# Altium PCB DAC-AK4493-DUAL.PcbDoc
Units mm, origin at the board's own origin, x right, y up, seen from the top; angles counter-clockwise.
Board outline 91 x 50 mm, 4 copper layers (Top Layer, VCC, GND, Bottom Layer), stack 1.62 mm thick; 94 components, 53 nets, 302 pads, 204 vias.
Unrouted connection lines stored in the file: 3.
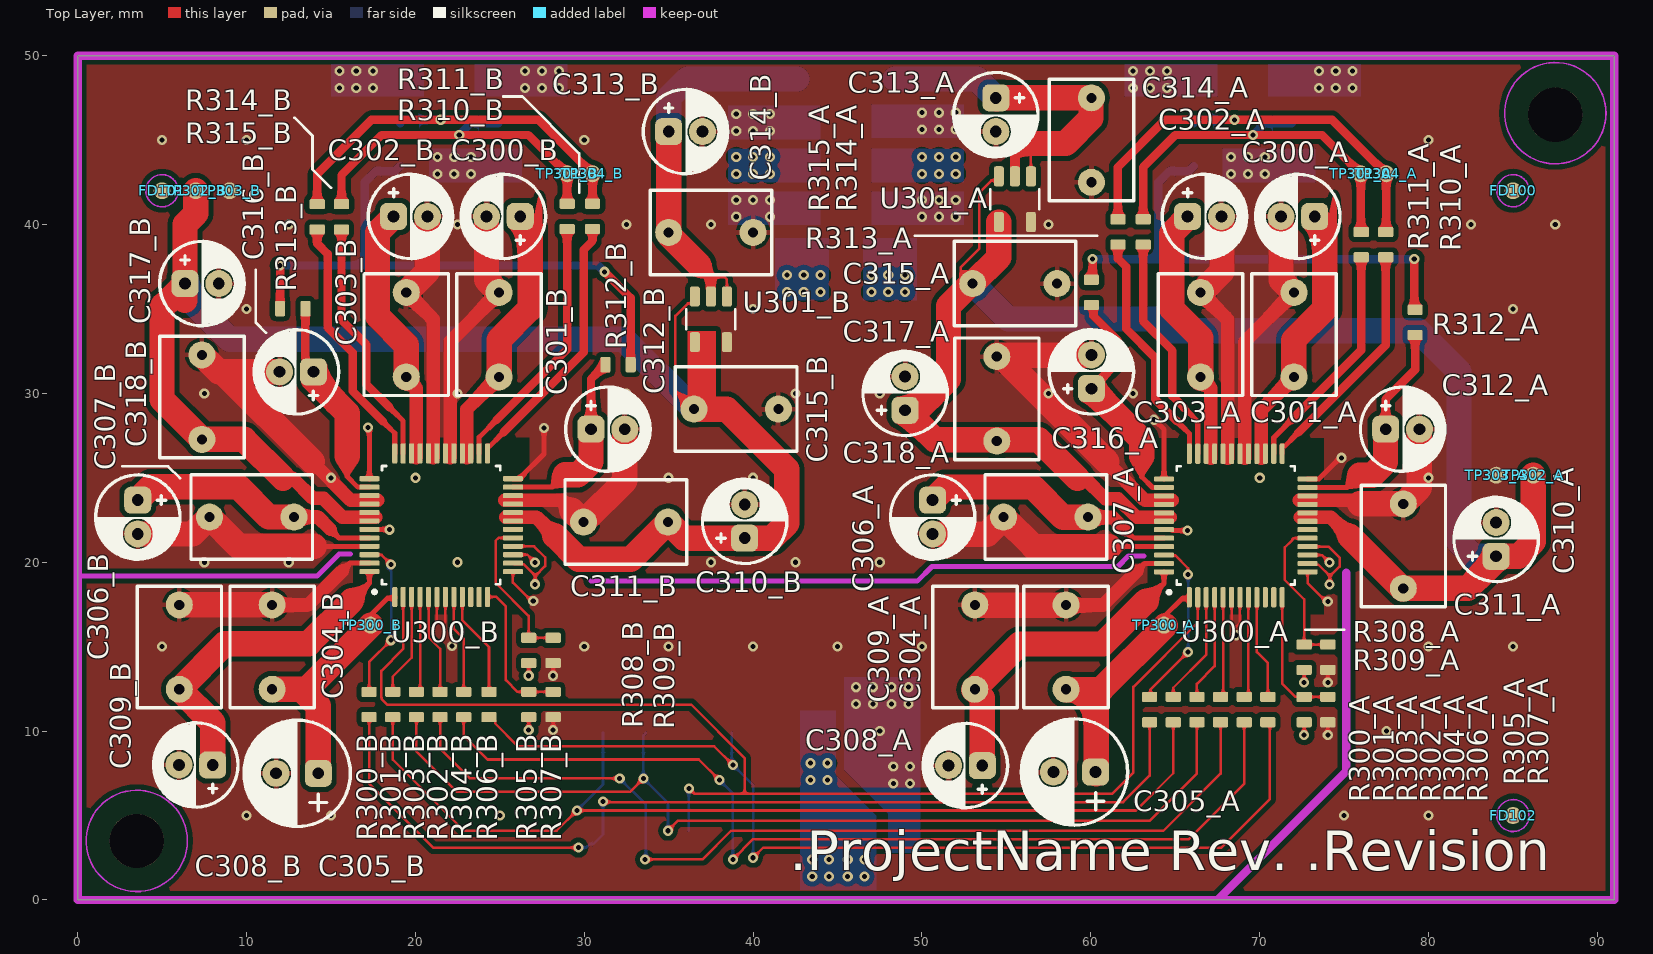
[diagram p0: Top Layer view]
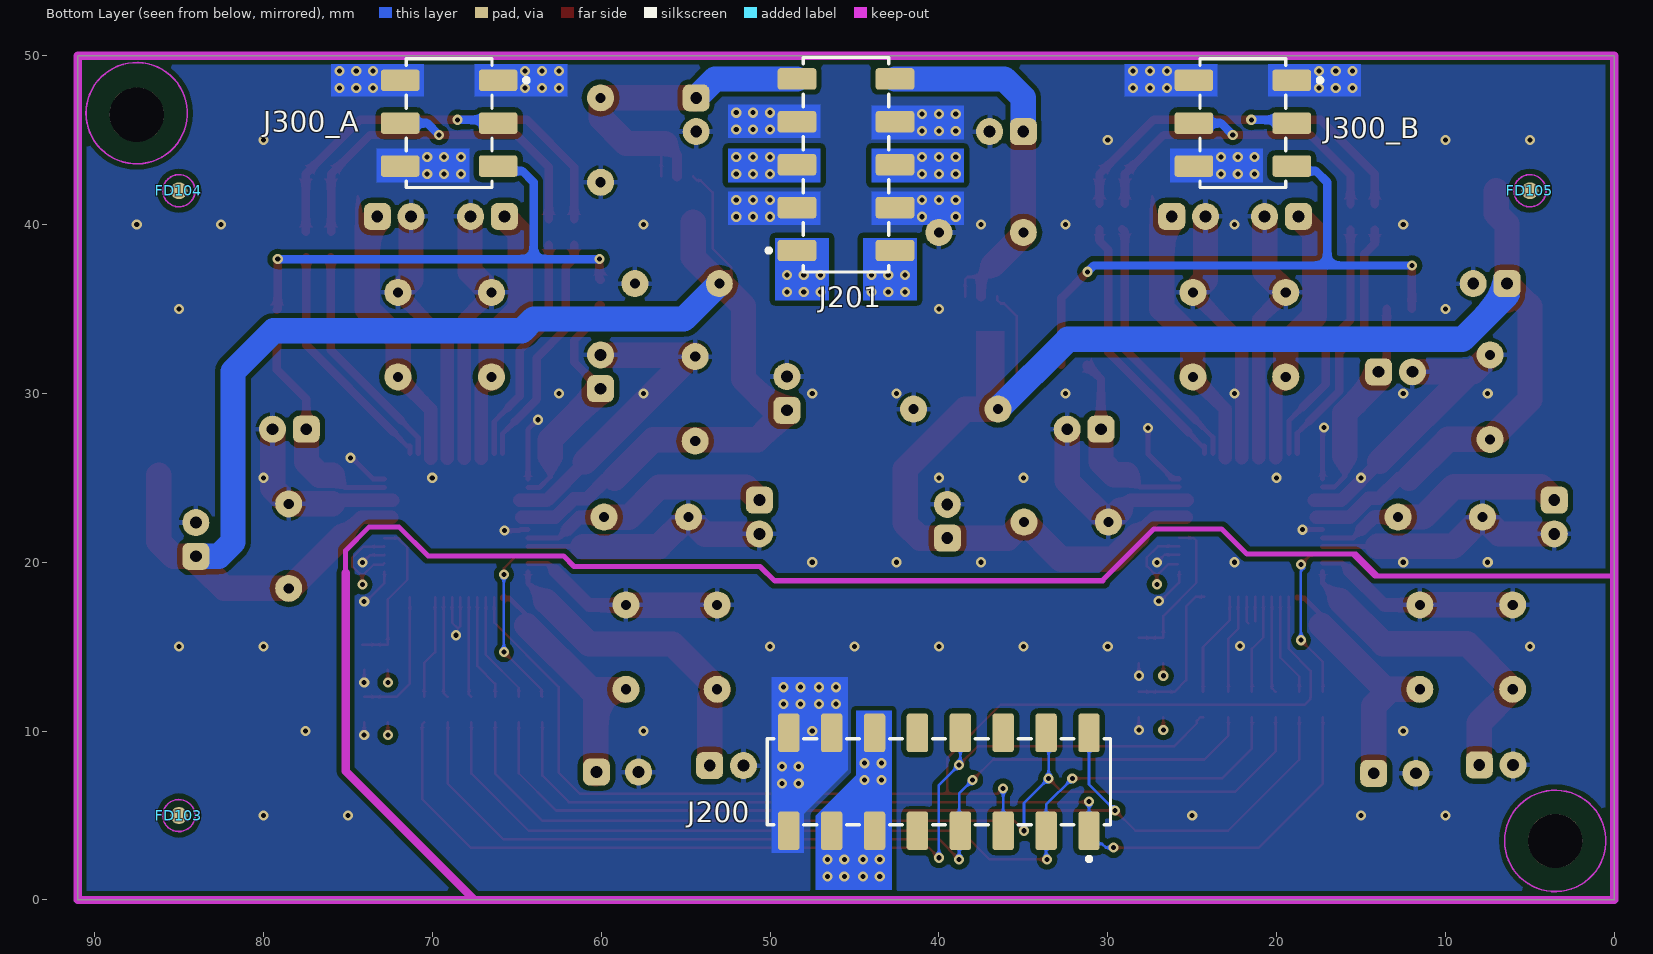
[diagram p1: Bottom Layer view, seen from below]
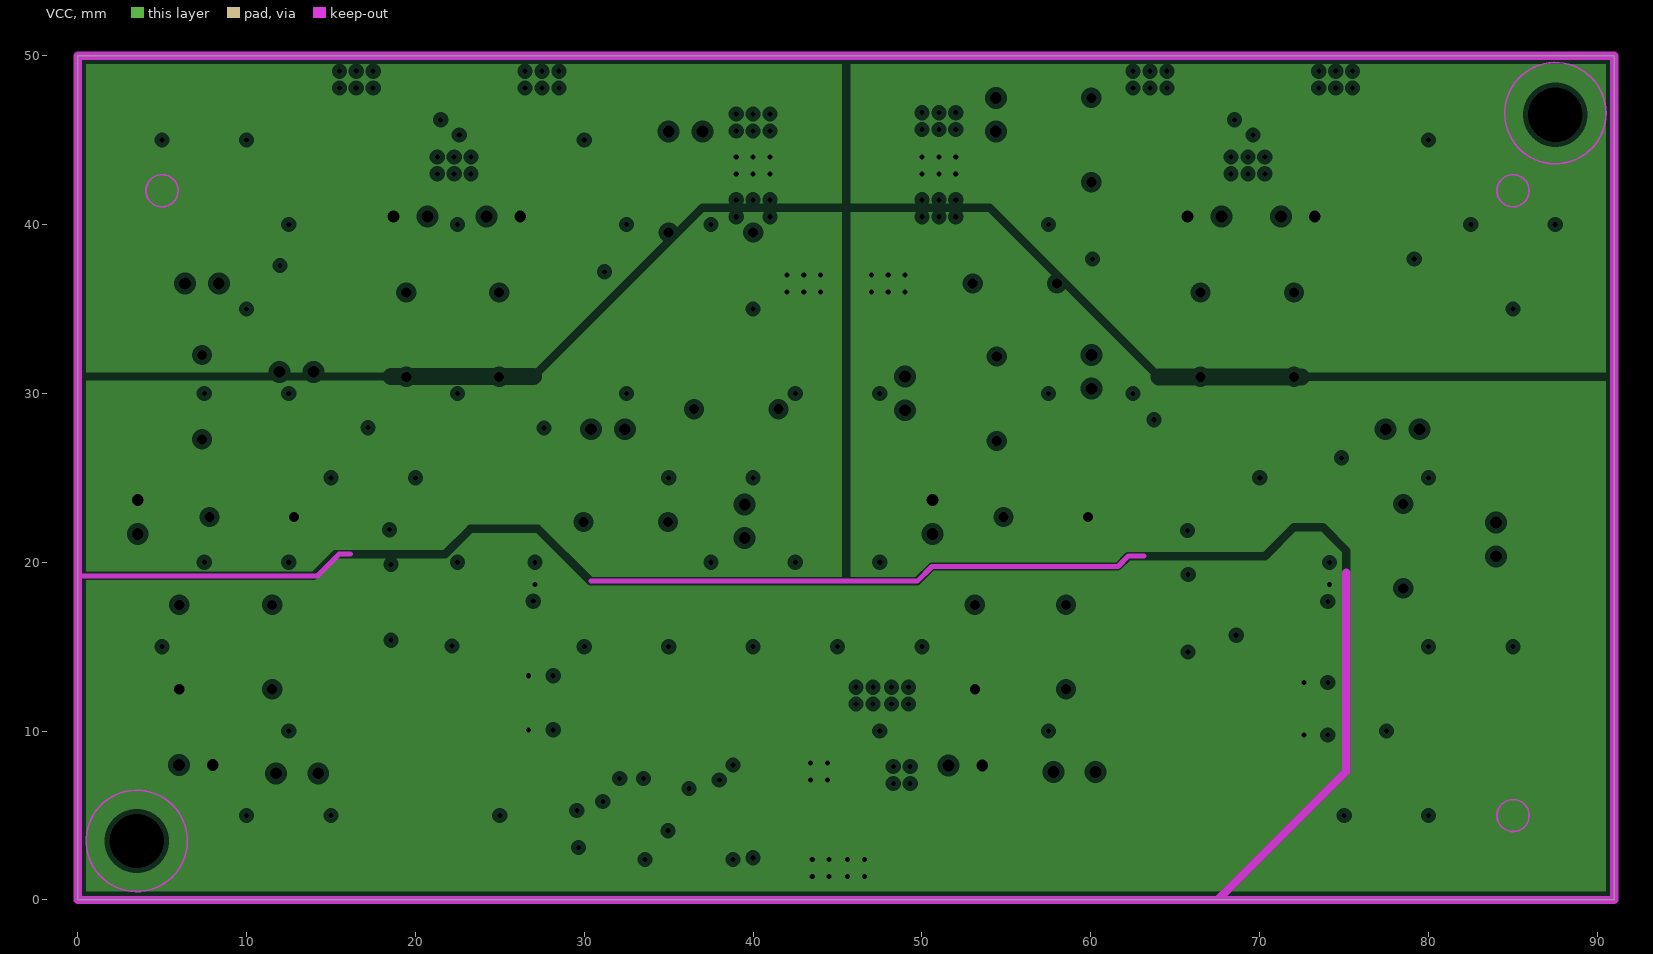
[diagram p2: VCC, clearances drawn from the general rule]
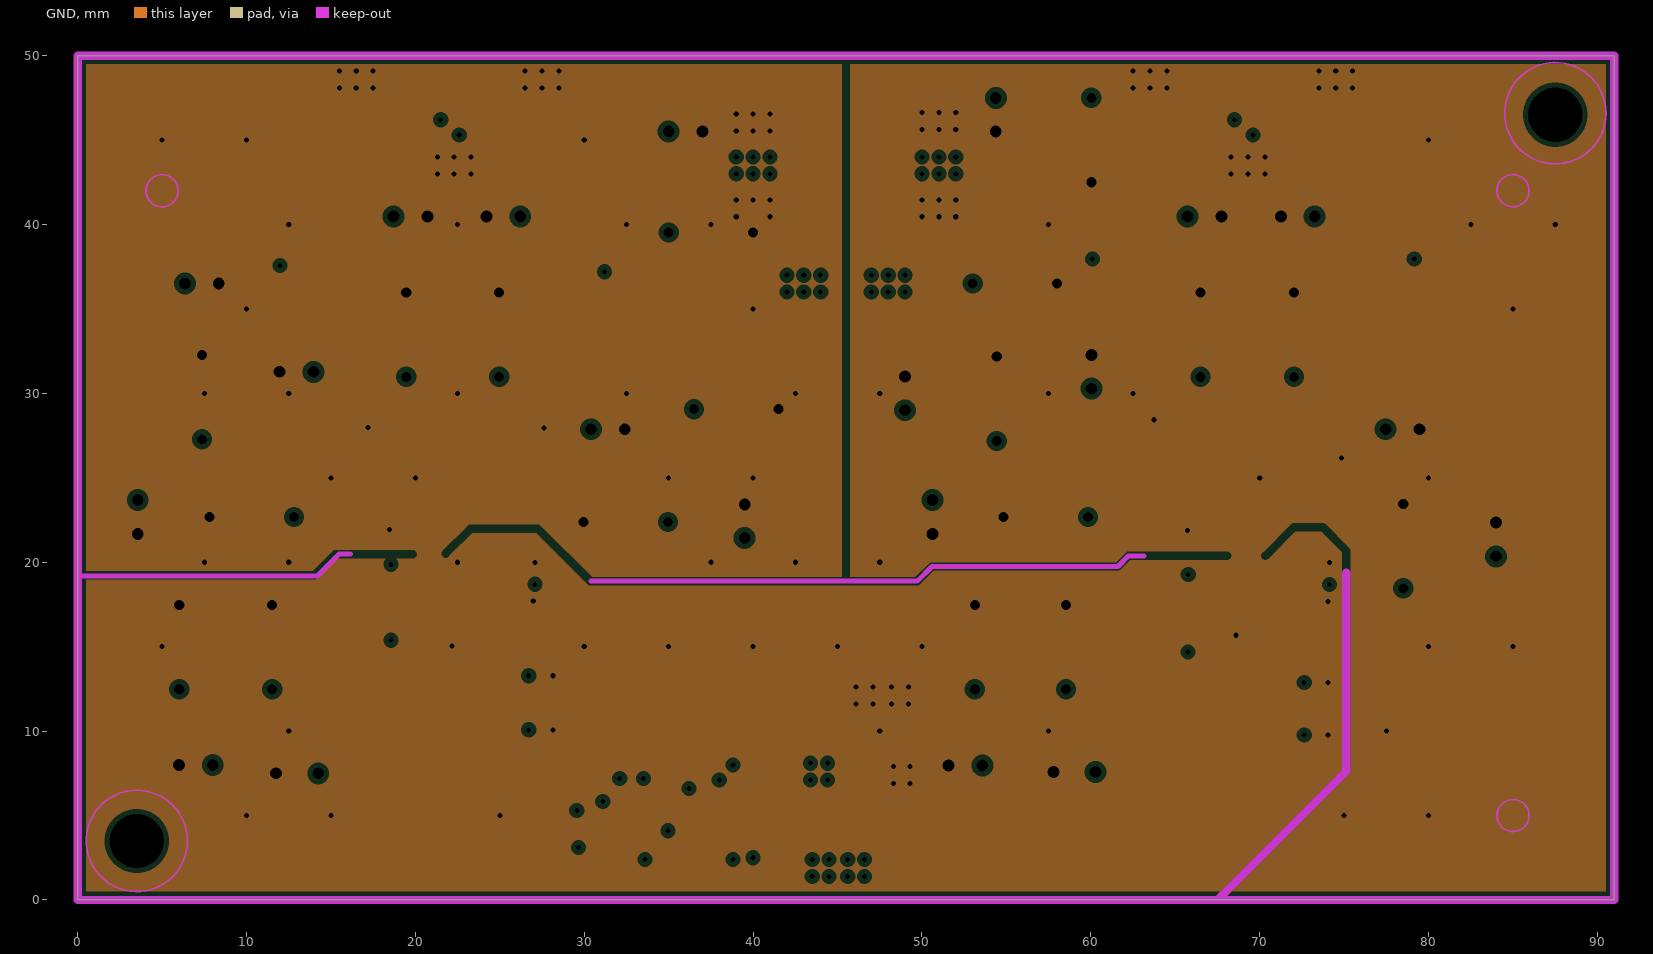
[diagram p3: GND, clearances drawn from the general rule]

## Layer stack, top to bottom
Top Solder: solder mask 0.0102, Solder Resist, Dk 3.5
Top Layer: signal copper 0.035
Dielectric 2: prepreg 0.14, PP-010, Dk 4.3
VCC: plane copper 0.035
Dielectric 1: core 1.2, Core-042, Dk 4.6
GND: plane copper 0.035, net AGND
Dielectric 3: prepreg 0.14, PP-010, Dk 4.3
Bottom Layer: signal copper 0.035
Bottom Solder: solder mask 0.0102, Solder Resist, Dk 3.5

## Board outline
0,0 91,0 91,50 0,50

## Design rules (kind name [scope] priority, off if disabled: settings)
Clearance "Clearance Polygon Highspeed" [InPolygon and InNet('GND') vs InNetClass('Ethernet') or InNetClass('HDMI') or InNetClass('LVDS') or InNetClass('PCIe') or InNetClass('SATA') or InNetClass('USBO1_HS') or InNetClass('USBO1_SS') or InNetClass('USBH2_HS') or InNetClass('USBH3_HS') or InNetClass('USBH4_HS') or InNetClass('USBH4_SS')] p1: gap=0.15 ignorepadtopadclearanceinfootprint=FALSE except(0: Arc-Hole Track-Hole SMDPad-Hole THPad-Hole Via-Hole Fill-Hole Poly-Hole Region-Hole Text-Hole; 1.5: Arc-Fill Arc-Poly Arc-Region Track-Fill Track-Poly Track-Region SMDPad-Fill SMDPad-Poly SMDPad-Region THPad-Fill THPad-Poly THPad-Region Via-Fill Via-Poly Via-Region Fill-Fill Fill-Poly Fill-Region Poly-Poly Poly-Region Region-Region)
Clearance "Analog Polygon" [InNet('AGND') and InPolygon] p2: gap=0.15 ignorepadtopadclearanceinfootprint=FALSE except(0: Arc-Hole Track-Hole SMDPad-Hole THPad-Hole Via-Hole Fill-Hole Poly-Hole Region-Hole Text-Hole; 0.3: Arc-Fill Arc-Poly Arc-Region Track-Fill Track-Poly Track-Region SMDPad-Fill SMDPad-Poly SMDPad-Region THPad-Fill THPad-Poly THPad-Region Via-Fill Via-Poly Via-Region Fill-Fill Fill-Poly Fill-Region Poly-Poly Poly-Region Region-Region)
Clearance "Digital Polygon" [InNet('GND') and InPolygon] p3: gap=0.15 ignorepadtopadclearanceinfootprint=FALSE except(0: Arc-Hole Track-Hole SMDPad-Hole THPad-Hole Via-Hole Fill-Hole Poly-Hole Region-Hole Text-Hole; 0.3: Arc-Fill Arc-Poly Arc-Region Track-Fill Track-Poly Track-Region SMDPad-Fill SMDPad-Poly SMDPad-Region THPad-Fill THPad-Poly THPad-Region Via-Fill Via-Poly Via-Region Fill-Fill Fill-Poly Fill-Region Poly-Poly Poly-Region Region-Region)
Clearance "Diff Pairs" [InNetClass('Ethernet') or InNetClass('SATA') or InNetClass('HDMI') or InNetClass('PCIe') or InNetClass('LVDS')] p4: gap=0.1 ignorepadtopadclearanceinfootprint=FALSE except(1: Arc-Fill Arc-Poly Arc-Region Track-Fill Track-Poly Track-Region SMDPad-Fill SMDPad-Poly SMDPad-Region THPad-Fill THPad-Poly THPad-Region Via-Fill Via-Poly Via-Region Fill-Fill Fill-Poly Fill-Region Poly-Poly Poly-Region Region-Region)
Clearance [All] p5: gap=0.15 ignorepadtopadclearanceinfootprint=FALSE except(0: Arc-Hole Track-Hole SMDPad-Hole THPad-Hole Via-Hole Fill-Hole Poly-Hole Region-Hole Text-Hole)
ComponentClearance [All] p1: gap=0.2 collisioncheckmode=3 verticalgap=0.2 showdistances=FALSE
DiffPairsRouting Diff_Ethernet [InNetClass('Ethernet')] p1: maxlimit=2 minlimit=0.135 mostfreqgap=0.135 toplayer_minwidth=0.165 toplayer_maxwidth=0.165 toplayer_prefwidth=0.165 bottomlayer_minwidth=0.165 bottomlayer_maxwidth=0.165 bottomlayer_prefwidth=0.165 impedanceprofiledriven=TRUE impedanceprofileid={0758E92C-ECA7-4BD1-944C-2B5039B24D7F} impedanceprofilevalue=95.000000 maxuncoupledlength=12.7
DiffPairsRouting Diff_PCIe [InNetClass('PCIe')] p2: maxlimit=2 minlimit=0.16 mostfreqgap=0.16 toplayer_minwidth=0.198 toplayer_maxwidth=0.198 toplayer_prefwidth=0.198 bottomlayer_minwidth=0.198 bottomlayer_maxwidth=0.198 bottomlayer_prefwidth=0.198 impedanceprofiledriven=TRUE impedanceprofileid={872D3C10-AE81-4B26-BAE9-CD09B3029D58} impedanceprofilevalue=90.000000 maxuncoupledlength=12.7
DiffPairsRouting Diff_HDMI [InNetClass('HDMI')] p3: maxlimit=2 minlimit=0.16 mostfreqgap=0.16 toplayer_minwidth=0.198 toplayer_maxwidth=0.198 toplayer_prefwidth=0.198 bottomlayer_minwidth=0.198 bottomlayer_maxwidth=0.198 bottomlayer_prefwidth=0.198 impedanceprofiledriven=TRUE impedanceprofileid={872D3C10-AE81-4B26-BAE9-CD09B3029D58} impedanceprofilevalue=90.000000 maxuncoupledlength=12.7
DiffPairsRouting Diff_SATA [InNetClass('SATA')] p4: maxlimit=2 minlimit=0.105 mostfreqgap=0.105 toplayer_minwidth=0.165 toplayer_maxwidth=0.165 toplayer_prefwidth=0.165 bottomlayer_minwidth=0.165 bottomlayer_maxwidth=0.165 bottomlayer_prefwidth=0.165 impedanceprofiledriven=TRUE impedanceprofileid={3923B0F9-8FB3-4A4E-B013-C19AAABC556E} impedanceprofilevalue=90.000000 maxuncoupledlength=12.7
DiffPairsRouting Diff_LVDS [InNetClass('LVDS')] p5: maxlimit=2 minlimit=0.17 mostfreqgap=0.17 toplayer_minwidth=0.165 toplayer_maxwidth=0.165 toplayer_prefwidth=0.165 bottomlayer_minwidth=0.165 bottomlayer_maxwidth=0.165 bottomlayer_prefwidth=0.165 impedanceprofiledriven=TRUE impedanceprofileid={7474D7DC-58A7-4FA6-A522-E63227D1F5B1} impedanceprofilevalue=100.000000 maxuncoupledlength=12.7
DiffPairsRouting DiffPairsRouting_USB [All] p6: maxlimit=2 minlimit=0.16 mostfreqgap=0.16 toplayer_minwidth=0.1 toplayer_maxwidth=0.198 toplayer_prefwidth=0.198 bottomlayer_minwidth=0.1 bottomlayer_maxwidth=0.198 bottomlayer_prefwidth=0.198 impedanceprofiledriven=TRUE impedanceprofileid={872D3C10-AE81-4B26-BAE9-CD09B3029D58} impedanceprofilevalue=90.000000 maxuncoupledlength=12.7
FabricationTestPointUsage FabricationTestPointUsage_1 [All] p1: valid=0 allowmultiple=FALSE
FabricationTestpoint FabricationTestpoint_1 [All] p1: side=3 testpointundercomponent=TRUE minsize=1.016 maxsize=2.54 preferedsize=1.524 minholesize=0 maxholesize=1.016 preferedholesize=0.813 testpointgrid=0.025 allowsidetop=TRUE allowsidebottom=TRUE usegrid=TRUE gridtolerance=0
Height [All] p1: minheight=0 maxheight=100 prefheight=0.254
HoleSize [All] p1: absolutevalues=TRUE maxlimit=6 minlimit=0.2 maxpercent=80.000 minpercent=20.000
HoleSize FabricationTestpoint [All] p2 off: absolutevalues=TRUE maxlimit=2.54 minlimit=0.025 maxpercent=80.000 minpercent=20.000
HoleSize FabricationTestPointUsage [All] p3 off: absolutevalues=TRUE maxlimit=2.54 minlimit=0.025 maxpercent=80.000 minpercent=20.000
MatchedLengths Match_PCIe [InNetClass('PCIe')] p1: tolerance=2 checknetsindiffpair=FALSE checkdiffpairvsdiffpair=TRUE checkxsignals=TRUE checkothers=TRUE
MatchedLengths Match_PCIe_Intra [InNetClass('PCIe')] p2: tolerance=0.15 checknetsindiffpair=TRUE checkdiffpairvsdiffpair=FALSE checkxsignals=FALSE checkothers=FALSE
MatchedLengths Match_SATA [InNetClass('SATA')] p3: tolerance=2 checknetsindiffpair=FALSE checkdiffpairvsdiffpair=TRUE checkxsignals=TRUE checkothers=TRUE
MatchedLengths Match_SATA_Intra [InNetClass('SATA')] p4: tolerance=0.15 checknetsindiffpair=TRUE checkdiffpairvsdiffpair=FALSE checkxsignals=FALSE checkothers=FALSE
MatchedLengths Match_Ethernet [InNetClass('Ethernet')] p5: tolerance=2 checknetsindiffpair=FALSE checkdiffpairvsdiffpair=TRUE checkxsignals=TRUE checkothers=TRUE
MatchedLengths Match_Ethernet_Intra [InNetClass('SATA')] p6: tolerance=0.25 checknetsindiffpair=TRUE checkdiffpairvsdiffpair=FALSE checkxsignals=FALSE checkothers=FALSE
MatchedLengths Match_HDMI [InNetClass('HDMI')] p7: tolerance=2 checknetsindiffpair=FALSE checkdiffpairvsdiffpair=TRUE checkxsignals=TRUE checkothers=TRUE
MatchedLengths Match_HDMI_Intra [InNetClass('HDMI')] p8: tolerance=0.75 checknetsindiffpair=TRUE checkdiffpairvsdiffpair=FALSE checkxsignals=FALSE checkothers=FALSE
MatchedLengths Match_LVDS_Intra [InNetClass('LVDS')] p9: tolerance=0.15 checknetsindiffpair=FALSE checkdiffpairvsdiffpair=TRUE checkxsignals=TRUE checkothers=TRUE
MatchedLengths Match_USBO1_SS [InNetClass('USBO1_SS')] p10: tolerance=2 checknetsindiffpair=FALSE checkdiffpairvsdiffpair=TRUE checkxsignals=TRUE checkothers=TRUE
MatchedLengths Match_USBH4_SS [InNetClass('USBH4_SS')] p11: tolerance=2 checknetsindiffpair=FALSE checkdiffpairvsdiffpair=TRUE checkxsignals=TRUE checkothers=TRUE
MatchedLengths Match_USB_SS_Intra [InNetClass('USBO1_SS') or InNetClass('USBH4_SS')] p12: tolerance=0.15 checknetsindiffpair=TRUE checkdiffpairvsdiffpair=FALSE checkxsignals=FALSE checkothers=FALSE
MatchedLengths Match_USB_HS_Intra [InNetClass('USBO1_HS') or InNetClass('USBH2_HS') or InNetClass('USBH3_HS') or InNetClass('USBH4_HS')] p13: tolerance=1.1 checknetsindiffpair=TRUE checkdiffpairvsdiffpair=FALSE checkxsignals=FALSE checkothers=FALSE
MinimumAnnularRing [All] p1: minimumring=0.15
MinimumSolderMaskSliver [All] p1: minsoldermaskwidth=0.1
PlaneClearance [All] p1: clearance=0.3
PlaneConnect [All] p1: planeconnectstyle=Direct reliefexpansion=0.4 reliefentries=4 reliefconductorwidth=0.15 reliefairgap=0.15
PolygonConnect [All] p1: thpad.connectstyle=Relief thpad.reliefconductorwidth=0.3 thpad.reliefentries=4 thpad.polygonreliefangle="90 Angle" thpad.airgapwidth=0.2 smdpad.connectstyle=Direct smdpad.reliefconductorwidth=0.15 smdpad.reliefentries=4 smdpad.polygonreliefangle="90 Angle" smdpad.airgapwidth=0.254 via.connectstyle=Direct via.reliefconductorwidth=0.15 via.reliefentries=4 via.polygonreliefangle="90 Angle" via.airgapwidth=0.254
RoutingCorners [All] p1: cornerstyle=45-Degree minsetback=1.25 maxsetback=1.25
RoutingVias [All] p1: holewidth=0.3 width=0.6 viastyle="Through Hole" minholewidth=0.2 minwidth=0.45 maxholewidth=0.45 maxwidth=0.75
SilkToSilkClearance [All] p1: silktosilkclearance=0.1
SilkToSolderMaskClearance [IsPad] p1: minsilkscreentomaskgap=0.1 clearancetoexposedcopper=TRUE
SolderMaskExpansion [All] p1: expansion=0.075 istentingtop=FALSE
Width [All] p1: maxlimit=10 minlimit=0.125 preferedwidth=0.15
18 further rules are at their usual default settings.

## Classes and differential pairs
component class "Hardware Achitecture": FD100 FD101 FD102 FD103 FD104 FD105
component class "DAC Module Interface": J200 J201
channel class DAC: A B
component class B: C300_B C301_B C302_B C303_B C304_B C305_B C306_B C307_B C308_B C309_B C310_B C311_B C312_B C313_B C314_B C315_B C316_B C317_B C318_B J300_B R300_B R301_B R302_B R303_B R304_B R305_B R306_B R307_B R308_B R309_B R310_B R311_B R312_B R313_B R314_B R315_B TP300_B TP301_B TP302_B TP303_B TP304_B U300_B U301_B
component class A: C300_A C301_A C302_A C303_A C304_A C305_A C306_A C307_A C308_A C309_A C310_A C311_A C312_A C313_A C314_A C315_A C316_A C317_A C318_A J300_A R300_A R301_A R302_A R303_A R304_A R305_A R306_A R307_A R308_A R309_A R310_A R311_A R312_A R313_A R314_A R315_A TP300_A TP301_A TP302_A TP303_A TP304_A U300_A U301_A

## Components (designator, comment, footprint, x,y, rotation, side; value= is the part's Value field where it differs from the comment)
C300_A "10µF" CAP-5-11.5-2 72.255,40.477 r180 top (schematic designator C300)
C300_B "10µF" CAP-5-11.5-2 25.21,40.477 r180 top (schematic designator C300)
C301_A "100nF" CAP_WIMA_MKP4F 72.03,33.477 r270 top (schematic designator C301)
C301_B "100nF" CAP_WIMA_MKP4F 24.96,33.477 r270 top (schematic designator C301)
C302_A "10µF" CAP-5-11.5-2 66.73,40.477 r0 top (schematic designator C302)
C302_B "10µF" CAP-5-11.5-2 19.71,40.477 r0 top (schematic designator C302)
C303_A "100nF" CAP_WIMA_MKP4F 66.491,33.477 r270 top (schematic designator C303)
C303_B "100nF" CAP_WIMA_MKP4F 19.46,33.477 r270 top (schematic designator C303)
C304_A "100nF" CAP_WIMA_MKP4F 58.53,14.977 r270 top (schematic designator C304)
C304_B "100nF" CAP_WIMA_MKP4F 11.52,14.977 r270 top (schematic designator C304)
C305_A "1µF" CAP-6.3-11.2-2.5 59.03,7.577 r180 top (schematic designator C305)
C305_B "1µF" CAP-6.3-11.2-2.5 13,7.5 r180 top (schematic designator C305)
C306_A "10µF" CAP-5-11.5-2 50.63,22.677 r270 top (schematic designator C306)
C306_B "10µF" CAP-5-11.5-2 3.56,22.677 r270 top (schematic designator C306)
C307_A "100nF" CAP_WIMA_MKP4F 57.33,22.677 r0 top (schematic designator C307)
C307_B "100nF" CAP_WIMA_MKP4F 10.31,22.677 r0 top (schematic designator C307)
C308_A "10µF" CAP-5-11.5-2 52.571,7.959 r180 top (schematic designator C308)
C308_B "10µF" CAP-5-11.5-2 7,8 r180 top (schematic designator C308)
C309_A "100nF" CAP_WIMA_MKP4F 53.13,14.977 r270 top (schematic designator C309)
C309_B "100nF" CAP_WIMA_MKP4F 6.02,14.977 r270 top (schematic designator C309)
C310_A "10µF" CAP-5-11.5-2 84,21.352 r90 top (schematic designator C310)
C310_B "10µF" CAP-5-11.5-2 39.5,22.427 r90 top (schematic designator C310)
C311_A "100nF" CAP_WIMA_MKP4F 78.5,20.955 r270 top (schematic designator C311)
C311_B "100nF" CAP_WIMA_MKP4F 32.46,22.377 r0 top (schematic designator C311)
C312_A "10µF" CAP-5-11.5-2 78.46,27.877 r0 top (schematic designator C312)
C312_B "10µF" CAP-5-11.5-2 31.4,27.877 r0 top (schematic designator C312)
C313_A "10µF" CAP-5-11.5-2 54.373,46.5 r270 top (schematic designator C313)
C313_B "10µF" CAP-5-11.5-2 36,45.5 r0 top (schematic designator C313)
C314_A "100nF" CAP_WIMA_MKP4F 60.03,45 r90 top (schematic designator C314)
C314_B "100nF" CAP_WIMA_MKP4F 37.5,39.527 r180 top (schematic designator C314)
C315_A "100nF" CAP_WIMA_MKP4F 55.5,36.5 r180 top (schematic designator C315)
C315_B "100nF" CAP_WIMA_MKP4F 39,29.067 r180 top (schematic designator C315)
C316_A "10µF" CAP-5-11.5-2 60.03,31.277 r90 top (schematic designator C316)
C316_B "10µF" CAP-5-11.5-2 12.96,31.277 r180 top (schematic designator C316)
C317_A "10µF" CAP-5-11.5-2 49,30 r90 top (schematic designator C317)
C317_B "10µF" CAP-5-11.5-2 7.36,36.5 r0 top (schematic designator C317)
C318_A "100nF" CAP_WIMA_MKP4F 54.43,29.677 r90 top (schematic designator C318)
C318_B "100nF" CAP_WIMA_MKP4F 7.36,29.777 r90 top (schematic designator C318)
FD100 "Fiducial" FIDUCIAL 85,42 r90 top
FD101 "Fiducial" FIDUCIAL 5,42 r90 top
FD102 "Fiducial" FIDUCIAL 85,5 r90 top
FD103 "Fiducial" FIDUCIAL 85,5 r90 bottom
FD104 "Fiducial" FIDUCIAL 85,42 r90 bottom
FD105 "Fiducial" FIDUCIAL 5,42 r90 bottom
J200 "HLE-108-02-L-DV" HLE-108-02-XXX-DV-A 40,7 r0 top
J201 "HLE-105-02-G-DV" HLE-105-02-XXX-DV-A 45.5,43.54 r90 top
J300_A "HLE-103-02-L-DV" HLE-103-02-XXX-DV 69,46 r270 top (schematic designator J300)
J300_B "HLE-103-02-L-DV" HLE-103-02-XXX-DV 22,46 r270 top (schematic designator J300)
R300_A "22Ω" SMD0603RES 63.48,11.277 r270 top (schematic designator R300)
R300_B "22Ω" SMD0603RES 17.26,11.577 r270 top (schematic designator R300)
R301_A "22Ω" SMD0603RES 64.88,11.277 r270 top (schematic designator R301)
R301_B "22Ω" SMD0603RES 18.66,11.577 r270 top (schematic designator R301)
R302_A "22Ω" SMD0603RES 67.68,11.277 r270 top (schematic designator R302)
R302_B "22Ω" SMD0603RES 21.46,11.577 r270 top (schematic designator R302)
R303_A "22Ω" SMD0603RES 66.28,11.277 r270 top (schematic designator R303)
R303_B "22Ω" SMD0603RES 20.06,11.577 r270 top (schematic designator R303)
R304_A "22Ω" SMD0603RES 69.08,11.277 r270 top (schematic designator R304)
R304_B "22Ω" SMD0603RES 22.86,11.577 r270 top (schematic designator R304)
R305_A "10kΩ" SMD0603RES 72.63,11.277 r270 top (schematic designator R305)
R305_B "10kΩ" SMD0603RES 26.71,11.577 r270 top (schematic designator R305)
R306_A "22Ω" SMD0603RES 70.48,11.277 r270 top (schematic designator R306)
R306_B "22Ω" SMD0603RES 24.36,11.577 r270 top (schematic designator R306)
R307_A "10kΩ" SMD0603RES 74.03,11.277 r270 top (schematic designator R307)
R307_B "10kΩ" SMD0603RES 28.16,11.577 r270 top (schematic designator R307)
R308_A "10kΩ" SMD0603RES 72.63,14.377 r270 top (schematic designator R308)
R308_B "10kΩ" SMD0603RES 26.71,14.777 r270 top (schematic designator R308)
R309_A "10kΩ" SMD0603RES 74.03,14.377 r270 top (schematic designator R309)
R309_B "10kΩ" SMD0603RES 28.16,14.777 r270 top (schematic designator R309)
R310_A "82Ω" SMD0603RES 77.46,38.809 r270 top (schematic designator R310)
R310_B "82Ω" SMD0603RES 30.489,40.477 r270 top (schematic designator R310)
R311_A "82Ω" SMD0603RES 76.011,38.809 r270 top (schematic designator R311)
R311_B "82Ω" SMD0603RES 28.989,40.477 r270 top (schematic designator R311)
R312_A "DNP" SMD0603RES 79.2,34.2 r90 top (schematic designator R312)
R312_B "DNP" SMD0603RES 32,31.7 r0 top (schematic designator R312)
R313_A "DNP" SMD0603RES 60.03,35.977 r90 top (schematic designator R313)
R313_B "DNP" SMD0603RES 12.738,35.017 r180 top (schematic designator R313)
R314_A "82Ω" SMD0603RES 63.101,39.559 r270 top (schematic designator R314)
R314_B "82Ω" SMD0603RES 15.627,40.455 r270 top (schematic designator R314)
R315_A "82Ω" SMD0603RES 61.601,39.559 r270 top (schematic designator R315)
R315_B "82Ω" SMD0603RES 14.187,40.455 r270 top (schematic designator R315)
TP300_A "Testpoint" TP 64.33,16.277 r90 top (schematic designator TP300)
TP300_B "Testpoint" TP 17.36,16.277 r90 top (schematic designator TP300)
TP301_A "Testpoint" TP 75.989,43 r90 top (schematic designator TP301)
TP301_B "Testpoint" TP 28.989,43 r90 top (schematic designator TP301)
TP302_A "Testpoint" TP 86.2,25.159 r90 top (schematic designator TP302)
TP302_B "Testpoint" TP 7,42 r0 top (schematic designator TP302)
TP303_A "Testpoint" TP 84,25.159 r90 top (schematic designator TP303)
TP303_B "Testpoint" TP 9,42 r0 top (schematic designator TP303)
TP304_A "Testpoint" TP 77.489,43 r90 top (schematic designator TP304)
TP304_B "Testpoint" TP 30.489,43 r90 top (schematic designator TP304)
U300_A "AK4493" LQFP48 65.83,17.927 r90 top (schematic designator U300)
U300_B "AK4493" LQFP48 18.779,17.945 r90 top (schematic designator U300)
U301_A "ADR395" SOT-23-5 55.5,41.5 r180 top (schematic designator U301)
U301_B "ADR395" SOT-23-5 37.5,34.387 r180 top (schematic designator U301)

## Footprints (in the part's own frame and the unit in brackets; to place one, negate y for a bottom-side part, rotate by r counter-clockwise, add the part's x,y. Pads: shape width x height; smd on the part's side, far side on the other; paste and mask are expansions set on the pad)
CAP-5-11.5-2 [mm]
  round 1.6 hole 0.7: M(1,0)
  rrect50% 1.6x1.6 hole 0.7: P(-1,0)
  silkscreen extent -2.5,-2.5 2.5,2.5, body extent -2.5,-2.5 2.5,2.5, height 11
CAP-6.3-11.2-2.5 [mm]
  round 1.6 hole 0.7: M(1.25,0)
  rrect50% 1.6x1.6 hole 0.7: P(-1.25,0)
  silkscreen extent -3.15,-3.15 3.15,3.15, body extent -3.15,-3.15 3.15,3.15, height 11.2
CAP_WIMA_MKP4F [mm] "WIMA MKP4"
  round 1.6 hole 0.6: 1(-2.5,0) 2(2.5,0)
  silkscreen extent -3.6,-2.5 3.6,2.5, body extent -3.6,-2.5 3.6,2.5, height 10
FIDUCIAL [mm]
  round 1 smd paste-1 mask+0.5: ""(0,0)
  Keep-Out Layer circle w0.1: c0,0 r0.95
HLE-103-02-XXX-DV [mm] "Samtec HLE 6P"
  rrect25% 1.27x2.286 smd far side mask+0.051: 1(-2.54,-2.9) 2(-2.54,2.9) 3(0,-2.9) 4(0,2.9) 5(2.54,-2.9) 6(2.54,2.9)
  body extent -3.81,-3.28 3.81,3.3, height 3.66
HLE-105-02-XXX-DV-A [mm] "Samtec HLE 10P"
  rrect25% 1.27x2.286 smd far side mask+0.051: 1(-5.08,-2.9) 2(-5.08,2.9) 3(-2.54,-2.9) 4(-2.54,2.9) 5(0,-2.9) 6(0,2.9) 7(2.54,-2.9) 8(2.54,2.9) 9(5.08,-2.9) 10(5.08,2.9)
  body extent -6.35,-3.28 6.35,3.3, height 3.66
HLE-108-02-XXX-DV-A [mm] "Samtec HLE 16P"
  rrect25% 1.27x2.286 smd far side mask+0.051: 1(-8.89,-2.9) 2(-8.89,2.9) 3(-6.35,-2.9) 4(-6.35,2.9) 5(-3.81,-2.9) 6(-3.81,2.9) 7(-1.27,-2.9) 8(-1.27,2.9) 9(1.27,-2.9) 10(1.27,2.9) 11(3.81,-2.9) 12(3.81,2.9) 13(6.35,-2.9) 14(6.35,2.9) 15(8.89,-2.9) 16(8.89,2.9)
  body extent -10.16,-3.28 10.16,3.3, height 3.66
LQFP48 [mm]
  rrect50% 1.2x0.3 smd: 1(0,0) 2(0,-0.5) 3(0,-1) 4(0,-1.5) 5(0,-2) 6(0,-2.5) 7(0,-3) 8(0,-3.5) 9(0,-4) 10(0,-4.5) 11(0,-5) 12(0,-5.5) 25(8.5,-5.5) 26(8.5,-5) 27(8.5,-4.5) 28(8.5,-4) 29(8.5,-3.5) 30(8.5,-3) 31(8.5,-2.5) 32(8.5,-2) 33(8.5,-1.5) 34(8.5,-1) 35(8.5,-0.5) 36(8.5,0)
  rrect50% 0.3x1.2 smd: 13(1.5,-7) 14(2,-7) 15(2.5,-7) 16(3,-7) 17(3.5,-7) 18(4,-7) 19(4.5,-7) 20(5,-7) 21(5.5,-7) 22(6,-7) 23(6.5,-7) 24(7,-7) 37(7,1.5) 38(6.5,1.5) 39(6,1.5) 40(5.5,1.5) 41(5,1.5) 42(4.5,1.5) 43(4,1.5) 44(3.5,1.5) 45(3,1.5) 46(2.5,1.5) 47(2,1.5) 48(1.5,1.5)
  silkscreen extent 0.2,-6.25 7.75,1.3, body extent -0.25,-7.25 8.75,1.76, height 1.5
SMD0603RES [mm]
  rrect25% 0.6x0.9 smd: 1(-0.75,0) 2(0.75,0)
  body extent -0.75,-0.4 0.75,0.4, height 0.45
SOT-23-5 [mm] "SOT-23-5"
  rrect50% 0.6x1.2 smd: 1(-0.95,-1.35) 2(0,-1.35) 3(0.95,-1.35) 4(0.95,1.35) 5(-0.95,1.35)
  silkscreen extent -1.45,-0.6 1.45,0.6, body extent -1.45,-1.4 1.45,1.4, height 1.2
TP [mm]
  round 1 smd paste-1: 1(0,0)

## Part data
C300_A C300_B C302_A C302_B C306_A C306_B C308_A C308_B C310_A C310_B C312_A C312_B C313_A C313_B C316_A C316_B C317_A C317_B: library part "Capacitor Electrolytic", "Elektrolytic Capacitor", Manufacturer Part No.=EEU-FR1H100, Voltage=50V
C301_A C301_B C303_A C303_B C304_A C304_B C307_A C307_B C309_A C309_B C311_A C311_B C314_A C314_B C315_A C315_B C318_A C318_B: library part "Capacitor Ceramic", "Ceramic Capacitor", Manufacturer Part No.=MKP2D031001F00KF00, Voltage=100V
C305_A C305_B: library part "Capacitor Electrolytic", "Elektrolytic Capacitor", Supplier Part Number 1=667-ECA-2VM010, Voltage=350V, Supplier 1=Mouser
FD100 FD101 FD102 FD103 FD104 FD105: "Fiducial Marker"
J200: library part "Receptacle 8x2P", "Receptacle 5x2P", Manufacturer Part No.=HLE-108-02-L-DV
J201: library part "Receptacle 5x2P", "Receptacle 5x2P", Manufacturer Part No.=HLE-105-02-G-DV
J300_A J300_B: library part "Receptacle 3x2P", "Receptacle 3x2P", Manufacturer Part No.=HLE-103-02-L-DV
R300_A R300_B R301_A R301_B R302_A R302_B R303_A R303_B R304_A R304_B R305_A R305_B R306_A R306_B R307_A R307_B R308_A R308_B R309_A R309_B R312_A R312_B R313_A R313_B: library part Resistor, "Resistor"
R310_A R310_B R311_A R311_B R314_A R314_B R315_A R315_B: library part Resistor, "Resistor Thin Film", Manufacturer Part No.=TNPW060322R0BEEA
U300_A U300_B: "32-Bit 2ch Audio DAC", Manufacturer Part No.=AK4493EQ
U301_A U301_B: Manufacturer Part No.=ADR395BUJZ-REEL7

## Free pads (board coordinates)
  round 3.2 hole 3.2 unplated mask+1.5: ""(3.5,3.5) ""(87.5,46.5)

## Via types
v1: diameter 0.6, hole 0.3, Top Layer to Bottom Layer, tented both sides, 204 vias

## Nets (pads, with @x,y where several pads share a name; then routed paths per layer and width w, separated by ;. In a path a pad name is that pad's centre, name@x,y a point inside that pad or via, vN(x,y) a via of type N, cw(c..) or ccw(c..) an arc to the next point about the centre after c; other vN are vias at no path point)
5V_REF_A: C310_A.P C311_A.2 C315_A.2 C317_A.P C318_A.1 TP302_A.1 U300_A.19 U300_A.20 U300_A.41 U300_A.42 U301_A.3 U301_A.4 | length 104.3
  Top Layer w0.15: C315_A.2 52.3,37.2 52.3,37.475 53.4,38.575 53.4,41.9 54.113,42.613 54.331,42.613 54.55,42.832 U301_A.3
  Top Layer w0.8: 59.211,24.959 59.648,24.959 60.848,23.759 61.611,23.759 62.711,22.659 64.711,22.659 ; 72.411,22.659 74.211,22.659 75.311,21.559
  Top Layer w1.5: U301_A.4 54.55,38.05 C315_A.2 52.981,36.481 52.875,36.481 51.571,35.177 51.571,30.85 49.771,29.05 49.05,29.05 C317_A.P 50.741,27.259 56.911,27.259 59.211,24.959 ; 75.311,21.559 78.457,18.413 C311_A.2 82.31,18.455 84,20.146 C310_A.P 85.321,20.352 86.2,21.231 TP302_A.1
  Bottom Layer w1.5: C315_A.2 55.1,34.4 64,34.4 64.7,33.7 79.4,33.7 81.8,31.3 81.8,21.2 82.648,20.352 C310_A.P
5V_REF_B: C310_B.P C311_B.2 C315_B.2 C317_B.P C318_B.1 TP302_B.1 U300_B.19 U300_B.20 U300_B.41 U300_B.42 U301_B.3 U301_B.4 | length 100.2
  Top Layer w0.15: C315_B.2 35.4,30.167 35.4,34.587 36.135,35.322 36.331,35.322 36.55,35.541 U301_B.3
  Top Layer w0.8: 12.16,24.977 12.738,24.977 13.938,23.777 14.56,23.777 15.66,22.677 17.66,22.677 ; 25.36,22.677 27.16,22.677 28.26,21.577
  Top Layer w1.5: 6.36,35.5 6.36,36.3 5,35.14 5,29.637 C318_B.1 9.86,27.277 12.16,24.977 ; C317_B.P 6.36,40.012 7,40.652 TP302_B.1 ; 28.26,21.577 29.66,20.177 32.76,20.177 C311_B.2 35.91,21.427 C310_B.P 41.121,21.427 42,22.306 42,25.5 38.433,29.067 C315_B.2
  Bottom Layer w1.5: C317_B.P 6.36,35.84 9,33.2 32.367,33.2 C315_B.2
A+3.3V: C306_A.P C306_B.P C307_A.2 C307_B.2 J201.1 J201.2 U300_A.44 U300_B.44 | length 30.6
  Top Layer w0.3: 14.935,21.977 15.467,21.445 U300_B.44 ; 61.986,21.959 62.518,21.427 U300_A.44
  Top Layer w0.8: C307_B.2 14.235,22.677 14.935,21.977 ; C307_A.2@59.861,22.659 61.286,22.659 61.986,21.959
  Top Layer w1.5: C306_B.P 4.36,24.477 9.51,24.477 11.31,22.677 C307_B.2 ; C306_A.P@50.611,23.659 51.411,24.459 56.561,24.459 58.361,22.659 C307_A.2@59.861,22.659
  other v1: 42,36 43,36 44,36 47,36 48,36 49,36 42,37 43,37 44,37 47,37 48,37 49,37
A+5V: C300_A.P C300_B.P C301_A.2 C301_B.2 C302_A.P C302_B.P C303_A.2 C303_B.2 J201.5 J201.6 U300_A.27 U300_A.28 U300_A.33 U300_A.34 U300_B.27 U300_B.28 U300_B.33 U300_B.34 | length 63.5
  Top Layer w0.8: C303_B.2@19.46,30.908 20.06,30.308 20.06,26.177 ; 23.05,26.177 23.05,29.067 C301_B.2 ; C303_A.2@66.511,30.89 67.111,30.29 67.111,26.159 ; 70.101,26.159 70.101,29.049 C301_A.2@72.011,30.959
  Top Layer w1.5: C302_B.P 17.76,39.527 17.76,34.577 19.46,32.877 C303_B.2 C303_B.2@19.46,30.908 ; C301_B.2 24.96,33.177 26.8,35.017 26.8,39.887 C300_B.P ; C302_A.P@65.761,40.459 64.78,39.478 64.78,35.02 66.511,33.289 C303_A.2@66.511,30.89 ; C301_A.2@72.011,30.959 72.011,33.159 73.851,34.999 73.851,39.869 C300_A.P@73.261,40.459
  other v1: 39,43 40,43 41,43 50,43 51,43 52,43 39,44 40,44 41,44 50,44 51,44 52,44
A+12V: C313_A.P C313_B.P C314_A.2 C314_B.2 J201.9 J201.10 U301_A.1 U301_A.2 U301_B.1 U301_B.2 | length 45
  Top Layer w0.15: 37.5,36.9 38.3,36.9 38.45,36.75 U301_B.1 ; 56.2,44.8 56.45,44.55 U301_A.1
  Top Layer w0.6: 36.8,37.6 37.5,36.9 U301_B.2 ; U301_A.2 55.5,44.1 56.2,44.8
  Top Layer w1.5: C313_B.P C314_B.2 35.019,39.508 35.019,39.381 36.8,37.6 ; C313_A.P@54.423,47.45 C313_A.P C314_A.2 60.011,47.481 60.011,46.3 58.511,44.8 56.2,44.8
  Bottom Layer w1.5: C313_B.P 35,47.5 36.12,48.62 J201.10 ; J201.9 53.253,48.62 C313_A.P
AGND: C300_A.M C300_B.M C301_A.1 C301_B.1 C302_A.M C302_B.M C303_A.1 C303_B.1 C304_A.1 C304_B.1 C305_A.M C305_B.M C306_A.M C306_B.M C307_A.1 C307_B.1 C308_A.M C308_B.M C309_A.1 C309_B.1 C310_A.M C310_B.M C311_A.1 C311_B.1 C312_A.M C312_B.M C313_A.M C313_B.M C314_A.1 C314_B.1 C315_A.1 C315_B.1 C316_A.M C316_B.M C317_A.M C317_B.M C318_A.2 C318_B.2 J200.14 J200.15 J200.16 J201.3 J201.4 J201.7 J201.8 J300_A.1 J300_A.2 J300_A.6 J300_B.1 J300_B.2 J300_B.6 R307_A.2 R307_B.2 R309_A.2 R309_B.2 TP303_A.1 TP303_B.1 U300_A.6 U300_A.7 U300_A.13 U300_A.15 U300_A.21 U300_A.22 U300_A.24 U300_A.29 U300_A.30 U300_A.31 U300_A.32 U300_A.37 U300_A.39 U300_A.40 U300_A.43 U300_A.45 U300_A.47 U300_B.6 U300_B.7 U300_B.13 U300_B.15 U300_B.21 U300_B.22 U300_B.24 U300_B.29 U300_B.30 U300_B.31 U300_B.32 U300_B.37 U300_B.39 U300_B.40 U300_B.43 U300_B.45 U300_B.47 U301_A.5 U301_B.5 | length 210.1
  Top Layer w0.15: 21.279,16.512 U300_B.6 ; 21.672,16.377 21.779,16.484 U300_B.7 ; U300_B.13 25.779,18.795 26.879,17.695 v1(26.979,17.695) ; U300_B.15 26.629,20.445 v1(27.079,19.995) ; v1(28.16,10.077) R307_B.2 ; v1(28.16,13.277) R309_B.2 ; U300_A.6 68.33,16.216 68.48,16.066 68.83,16.416 U300_A.7 ; U300_A.13 72.83,18.777 73.93,17.677 v1(74.03,17.677) ; U300_A.15@72.832,20.429 U300_A.15 73.68,20.427 v1(74.13,19.977) ; v1(74.03,9.777) R307_A.2 ; v1(74.03,12.877) R309_A.2
  Top Layer w0.3: 14.028,20.945 U300_B.45 ; 15.66,19.477 16.128,19.945 U300_B.47 ; v1@17.1,28.06 17.279,27.881 U300_B.37 ; U300_B.43 18.442,21.945 v1(18.46,21.927) ; U300_B.24 26.229,24.945 26.229,25.025 27.618,26.415 v1(27.618,27.946) ; 61.079,20.927 U300_A.45 ; 62.711,19.459 63.179,19.927 U300_A.47 ; v1@63.634,28.44 63.76,28.44 64.33,27.869 U300_A.37 ; U300_A.43 64.78,21.927 64.83,21.877 v1(65.73,21.877) ; U300_A.24 73.495,24.927 74.753,26.185 v1(74.842,26.185)
  Top Layer w0.8: C304_B.1 13.66,17.477 15.66,19.477 ; 13.885,25.952 16.16,23.677 17.76,23.677 ; C303_B.1 21.05,34.387 21.05,26.177 ; 22.06,26.177 22.06,33.077 C301_B.1 ; 25.3,23.677 28.66,23.677 29.26,23.077 ; C304_A.1@58.571,17.459 60.711,17.459 62.711,19.459 ; 60.936,25.934 63.211,23.659 64.33,23.659 64.811,23.659 ; C303_A.1@66.511,35.959 68.101,34.369 68.101,26.159 ; 69.111,26.159 69.111,33.059 C301_A.1@72.011,35.959 ; 72.351,23.659 75.711,23.659 75.913,23.457
  Top Layer w1.5: C306_B.M 6.81,21.677 C307_B.1 9.542,20.945 14.028,20.945 ; C309_B.1 C304_B.1 ; C318_B.2 8.36,31.277 8.593,31.277 ; C316_B.M 8.593,31.277 ; 13.902,25.969 8.593,31.277 ; C303_B.1 20.71,37.227 C302_B.M ; C300_B.M 24.21,36.727 C301_B.1 ; 29.26,23.077 C311_B.1 32.4,24.817 C312_B.M ; C306_A.M@50.611,21.659 53.861,21.659 54.861,22.659 56.593,20.927 61.079,20.927 ; C309_A.1@53.071,17.459 C304_A.1@58.571,17.459 ; C318_A.2@54.411,32.259 C318_A.2@54.645,32.259 ; C316_A.M@60.011,32.259 C318_A.2@54.645,32.259 ; 60.953,25.95 C318_A.2@54.645,32.259 ; C303_A.1@66.511,35.959 67.761,37.209 C302_A.M@67.761,40.459 ; C300_A.M@71.261,40.459 71.261,36.709 C301_A.1@72.011,35.959 ; 75.913,23.457 75.911,23.455 C311_A.1 79.451,24.407 C312_A.M@79.451,27.877
  other v1: 10,5 15,5 25,5 75,5 80,5 48.3,6.9 49.3,6.9 48.3,7.9 49.3,7.9 12.5,10 47.5,10 57.5,10 77.5,10 46.1,11.6 47.1,11.6 48.2,11.6 49.2,11.6 46.1,12.6 47.1,12.6 48.2,12.6 49.2,12.6 5,15 30,15 35,15 40,15 45,15 50,15 80,15 85,15 22.16,15.036 68.605,15.677 7.5,20 12.5,20 22.5,20 37.5,20 42.5,20 47.5,20 15,25 20,25 35,25 40,25 70,25 80,25 17.189,27.97 63.741,28.44 7.5,30 12.5,30 22.5,30 32.5,30 42.5,30 47.5,30 57.5,30 62.5,30 10,35 40,35 85,35 12.5,40 22.5,40 32.5,40 37.5,40 57.5,40 82.5,40 87.5,40 39,40.46 41,40.46 50,40.46 51,40.46 52,40.46 39,41.46 40,41.46 41,41.46 50,41.46 51,41.46 52,41.46 21.3,43 22.3,43 23.3,43 68.3,43 69.3,43 70.3,43 21.3,44 22.3,44 23.3,44 68.3,44 69.3,44 70.3,44 5,45 10,45 30,45 80,45 39,45.54 40,45.54 41,45.54 50,45.62 51,45.62 52,45.62 39,46.54 40,46.54 41,46.54 50,46.62 51,46.62 52,46.62 15.5,48.08 16.5,48.08 17.5,48.08 26.5,48.08 27.5,48.08 28.5,48.08 62.5,48.08 63.5,48.08 64.5,48.08 73.5,48.08 74.5,48.08 75.5,48.08 15.5,49.08 16.5,49.08 17.5,49.08 26.5,49.08 27.5,49.08 28.5,49.08 62.5,49.08 63.5,49.08 64.5,49.08 73.5,49.08 74.5,49.08 75.5,49.08
D+3.3V: C308_A.P C308_B.P C309_A.2 C309_B.2 J200.11 J200.12 J200.13 R305_A.2 R305_B.2 R308_A.2 R308_B.2 U300_A.14 U300_A.16 U300_A.48 U300_B.14 U300_B.16 U300_B.48 | length 53.3
  Top Layer w0.15: U300_B.16 27.029,20.945 27.679,20.295 27.679,19.766 27.104,19.191 ; U300_B.14@25.854,19.87 26.425,19.87 27.104,19.191 ; v1(26.71,10.077) R305_B.2 ; v1(26.71,13.277) R308_B.2 ; v1(27.079,18.695) 27.104,18.72 27.104,19.191 ; v1(72.63,9.777) R305_A.2 ; v1(72.63,12.877) R308_A.2 ; U300_A.14 72.905,19.852 73.476,19.852 74.155,19.173 ; U300_A.16@72.859,20.955 U300_A.16 74.08,20.927 74.73,20.277 74.73,19.748 74.155,19.173 ; v1(74.13,18.677) 74.155,18.702 74.155,19.173
  Top Layer w0.3: 16.22,17.717 17.279,18.776 U300_B.48 ; 63.271,17.699 64.33,18.757 U300_A.48
  Top Layer w1.5: C308_B.P 8,10.497 C309_B.2 8.72,15.177 13.68,15.177 16.22,17.717 ; C308_A.P 53.571,11.959 53.071,12.459 55.771,15.159 60.731,15.159 63.271,17.699
  other v1: 43.5,1.4 44.5,1.4 45.6,1.4 46.6,1.4 43.5,2.4 44.5,2.4 45.6,2.4 46.6,2.4 43.4,7.1 44.4,7.1 43.4,8.1 44.4,8.1
D\A\C\_\R\S\T\: J200.5 U300_A.2 U300_B.2 | length 73.1
  Top Layer w0.15: U300_B.2 19.279,14.864 17.985,13.57 17.985,11.978 17.997,11.965 17.997,11.9 18.332,11.565 36.335,11.565 39.5,8.4 39.5,6.3 ; v1(36.2,6.6) 36.213,6.6 36.513,6.3 39.5,6.3 ; U300_A.2 66.33,16.425 62.518,12.613 62.518,7.539 61.279,6.3 39.5,6.3
  Bottom Layer w0.15: J200.5 36.19,6.59 v1(36.2,6.6)
DAC_BCLK: J200.2 R301_A.2 R301_B.2 | length 60.1
  Top Layer w0.15: R301_B.2 18.66,8.319 22.879,4.1 28.36,4.1 v1(29.56,5.3) 62.673,5.3 64.88,7.507 R301_A.2
  Bottom Layer w0.15: v1(29.56,5.3) 31.11,6.85 J200.2
DAC_CS: J200.10
DAC_LRCLK: J200.3 R302_A.2 R302_B.2 | length 57.9
  Top Layer w0.15: R302_B.2 21.46,8.962 23.222,7.2 v1(32.1,7.2) ; v1(33.6,2.4) 37,2.4 38.7,4.1 64.3,4.1 67.68,7.48 R302_A.2
  Bottom Layer w0.15: v1(32.1,7.2) 33.65,5.65 J200.3 33.65,2.45 v1(33.6,2.4)
DAC_MCLK: J200.1 R300_A.2 R300_B.2 | length 57.8
  Top Layer w0.15: R300_B.2 17.26,6.89 21.05,3.1 v1(29.66,3.1) ; v1(31.1,5.825) 31.125,5.8 61.911,5.8 63.48,7.369 R300_A.2
  Bottom Layer w0.15: v1(29.66,3.1) 30.11,3.1 30.338,3.328 30.556,3.328 31.11,3.881 J200.1 31.11,5.815 v1(31.1,5.825)
DAC_MISO: J200.9
DAC_MUTE: J200.6
DAC_SCL_SCLK: J200.7 R304_A.2 R304_B.2 | length 58.1
  Top Layer w0.15: R304_B.2 22.86,9.738 24.279,8.319 36.781,8.319 v1(38,7.1) ; v1(38.8,2.4) 40,3.6 65.8,3.6 69.08,6.88 R304_A.2
  Bottom Layer w0.15: v1(38,7.1) 38.8,6.3 v1(38.8,2.4)
DAC_SDA_MOSI: J200.8 R306_A.2 R306_B.2 | length 60.3
  Top Layer w0.15: R306_B.2 24.497,10.827 24.722,10.602 24.722,10.465 26.087,9.1 37.7,9.1 v1(38.8,8) ; v1(40,2.5) 40.6,3.1 67.73,3.1 70.6,5.97 70.6,10.407 R306_A.2
  Bottom Layer w0.15: J200.8 38.73,8.07 v1(38.8,8) 40,6.8 v1(40,2.5)
DAC_SDATA: J200.4 R303_A.2 R303_B.2 | length 59
  Top Layer w0.15: R303_B.2 20.06,8.796 22.456,6.4 32.7,6.4 v1(33.5,7.2) ; v1(34.96,4.1) 35.56,4.7 63.5,4.7 66.28,7.48 R303_A.2
  Bottom Layer w0.15: J200.4 33.5,9.75 v1(33.5,7.2) 34.96,5.74 v1(34.96,4.1)
LDO+1.8V_A: C304_A.2 C305_A.P TP300_A.1 U300_A.1 | length 14.9
  Top Layer w0.3: TP300_A.1@64.411,16.259 64.411,16.859 65.406,17.853 65.83,17.853 U300_A.1
  Top Layer w1.5: C304_A.2@58.571,12.459 60.321,12.459 ; C305_A.P@60.321,7.459 60.321,12.459 ; TP300_A.1@64.411,16.259 60.611,12.459 60.321,12.459
LDO+1.8V_B: C304_B.2 C305_B.P TP300_B.1 U300_B.1 | length 15.3
  Top Layer w0.3: TP300_B.1 17.36,16.877 18.355,17.871 18.779,17.871 U300_B.1
  Top Layer w1.5: C304_B.2 13.27,12.477 ; C305_B.P 14.25,11.497 13.27,12.477 ; TP300_B.1 13.56,12.477 13.27,12.477
NetC312_A_P: C312_A.P R312_A.1 U300_A.23 | length 13.5
  Top Layer w0.3: U300_A.23 75.179,24.427 75.911,25.159
  Top Layer w0.5: C312_A.P 77.46,29.66 79.2,31.4 R312_A.1
  Top Layer w1.5: 75.911,25.159 76.676,25.159 77.451,25.934 C312_A.P@77.451,27.859
NetC312_B_P: C312_B.P R312_B.1 U300_B.23 | length 11.4
  Top Layer w0.3: U300_B.23 28.128,24.445 28.86,25.177
  Top Layer w0.5: C312_B.P 30.4,30.85 31.05,31.5 31.2,31.5 31.25,31.55 R312_B.1
  Top Layer w1.5: 28.86,25.177 29.625,25.177 30.4,25.952 C312_B.P
NetC316_A_P: C316_A.P R313_A.1 U300_A.38 | length 14.3
  Top Layer w0.3: 63.011,26.259 63.011,25.059 63.643,24.427 U300_A.38
  Top Layer w0.5: C316_A.P 61.601,31.848 61.601,33.13 60.151,34.581 60.151,35.177 60.101,35.227 R313_A.1
  Top Layer w1.5: C316_A.P@60.011,30.259 63.011,27.259 63.011,26.259
NetC316_B_P: C316_B.P R313_B.1 U300_B.38 | length 12.5
  Top Layer w0.3: 15.96,26.277 15.96,25.077 16.592,24.445 U300_B.38
  Top Layer w0.5: R313_B.1 13.488,32.12 13.503,32.106 13.503,31.734 C316_B.P
  Top Layer w1.5: C316_B.P 13.96,30.832 15.96,28.832 15.96,26.277
NetR300_A_1: R300_A.1 U300_A.46 | length 10.3
  Top Layer w0.15: R300_A.1 63.532,12.079 63.532,12.459 v1(65.75,14.677) ; U300_A.46 64.367,20.39 65.017,20.39 65.761,19.646 v1(65.761,19.277)
  Bottom Layer w0.15: v1(65.75,14.677) 65.761,14.688 v1(65.761,19.277)
NetR300_B_1: R300_B.1 U300_B.46 | length 9.8
  Top Layer w0.15: R300_B.1 17.26,14.082 18.56,15.382 v1(18.56,15.384) ; U300_B.46 17.284,20.439 17.997,20.439 v1(18.56,19.877)
  Bottom Layer w0.15: v1(18.56,15.384) 18.56,19.466 18.355,19.671 v1(18.56,19.877)
NetR301_A_1: R301_A.1 U300_A.3 | length 6.7
  Top Layer w0.15: R301_A.1 64.88,12.569 66.83,14.519 U300_A.3
NetR301_B_1: R301_B.1 U300_B.3 | length 6.1
  Top Layer w0.15: R301_B.1 18.66,13.227 19.779,14.346 U300_B.3
NetR302_A_1: R302_A.1 U300_A.5 | length 6
  Top Layer w0.15: R302_A.1 67.83,12.177 U300_A.5
NetR302_B_1: R302_B.1 U300_B.5 | length 5.9
  Top Layer w0.15: U300_B.5 20.779,15.558 21.46,14.877 R302_B.1
NetR303_A_1: R303_A.1 U300_A.4 | length 6.3
  Top Layer w0.15: R303_A.1 66.28,12.796 67.33,13.846 U300_A.4
NetR303_B_1: R303_B.1 U300_B.4 | length 5.7
  Top Layer w0.15: R303_B.1 20.279,12.546 U300_B.4
NetR304_A_1: R304_A.1 U300_A.8 | length 6
  Top Layer w0.15: R304_A.1 69.105,12.027 69.33,12.252 U300_A.8
NetR304_B_1: R304_B.1 U300_B.8 | length 5.9
  Top Layer w0.15: U300_B.8 22.279,16.058 22.86,15.477 R304_B.1
NetR305_A_1: R305_A.1 R307_A.1 U300_A.12 | length 8.1
  Top Layer w0.15: U300_A.12 71.33,12.827 72.13,12.027 R305_A.1 R307_A.1
NetR305_B_1: R305_B.1 R307_B.1 U300_B.12 | length 8.8
  Top Layer w0.15: U300_B.12 24.792,17.945 25.36,17.377 25.36,13.027 26.06,12.327 R305_B.1 R307_B.1
NetR306_A_1: R306_A.1 U300_A.9 | length 6.2
  Top Layer w0.15: U300_A.9 69.83,14.677 70.48,14.027 R306_A.1
NetR306_B_1: R306_B.1 U300_B.9 | length 6.3
  Top Layer w0.15: U300_B.9 22.779,16.558 24.36,14.977 R306_B.1
NetR308_A_1: R308_A.1 R309_A.1 U300_A.17 | length 9.3
  Top Layer w0.15: U300_A.17 72.005,21.427 71.93,21.352 71.93,21.327 71.48,20.877 71.48,18.958 72.63,17.808 R308_A.1 R309_A.1 R309_A.1@74.155,15.127
NetR308_B_1: R308_B.1 R309_B.1 U300_B.17 | length 9.1
  Top Layer w0.15: U300_B.17 24.928,21.445 24.76,21.277 24.76,18.777 26.71,16.827 R308_B.1 R309_B.1
NetR310_A_2: R310_A.2 U300_A.25 | length 14.2
  Top Layer w0.3: U300_A.25 71.33,26.877 71.48,26.877 72.286,27.684
  Top Layer w0.5: 72.286,27.684 77.46,32.857 R310_A.2@77.46,38.05
NetR310_B_2: R310_B.2 U300_B.25 | length 15.9
  Top Layer w0.3: U300_B.25 24.279,26.895 24.428,26.895 25.235,27.702
  Top Layer w0.5: 25.235,27.702 29.96,32.427 29.96,38.5 30.489,39.029 R310_B.2
NetR311_A_2: R311_A.2 U300_A.26 | length 13.8
  Top Layer w0.3: U300_A.26 70.83,27.387 70.84,27.387 71.861,28.409
  Top Layer w0.5: 71.861,28.409 76.011,32.559 R311_A.2
NetR311_B_2: R311_B.2 U300_B.26 | length 15.5
  Top Layer w0.3: U300_B.26 23.779,27.406 23.789,27.406 24.81,28.427
  Top Layer w0.5: 24.81,28.427 28.989,32.606 28.989,39.569 R311_B.2@29.147,39.727
NetR314_A_2: R314_A.2 U300_A.35 | length 13.7
  Top Layer w0.3: 65.511,29.159 66.33,28.34 U300_A.35
  Top Layer w0.5: R314_A.2 63.101,34.266 64.83,32.537 64.83,29.84 65.511,29.159
NetR314_B_2: R314_B.2 U300_B.35 | length 14.8
  Top Layer w0.3: 18.46,29.177 19.279,28.358 U300_B.35
  Top Layer w0.5: R314_B.2 15.627,34.35 17.1,32.877 17.1,30.537 18.46,29.177
NetR315_A_2: R315_A.2 U300_A.36 | length 14.1
  Top Layer w0.3: 65.111,28.34 65.83,27.621 U300_A.36
  Top Layer w0.5: R315_A.2 61.601,37.985 62.1,37.486 62.1,33.811 63.8,32.111 63.8,29.651 65.111,28.34
NetR315_B_2: R315_B.2 U300_B.36 | length 15.2
  Top Layer w0.3: 18.06,28.358 18.779,27.639 U300_B.36
  Top Layer w0.5: R315_B.2 14.187,38.873 14.8,38.26 14.8,33.9 16.279,32.421 16.279,30.139 18.06,28.358
OUT_A_N: J300_A.4 R311_A.1 R314_A.1 TP301_A.1 | length 23.8
  Top Layer w0.5: R314_A.1 63.101,43.401 65,45.3 68.5,45.3 73.689,45.3 TP301_A.1 R311_A.1@75.989,39.559
  Bottom Layer w0.5: v1(69.6,45.3) 70.3,46 J300_A.4
OUT_A_P: J300_A.3 R310_A.1 R315_A.1 TP304_A.1 | length 27.4
  Top Layer w0.5: R315_A.1 61.601,43.401 64.4,46.2 69.6,46.2 74.289,46.2 TP304_A.1 R310_A.1@77.489,39.559
  Bottom Layer w0.5: J300_A.3 66.3,46.2 v1(68.5,46.2)
OUT_B_N: J300_B.4 R311_B.1 R314_B.1 TP301_B.1 | length 21.4
  Top Layer w0.5: R314_B.1 15.627,42.927 18,45.3 v1(22.6,45.3) 26.689,45.3 TP301_B.1 R311_B.1
  Bottom Layer w0.5: v1(22.6,45.3) 23.3,46 J300_B.4
OUT_B_P: J300_B.3 R310_B.1 R315_B.1 TP304_B.1 | length 25
  Top Layer w0.5: R315_B.1 14.187,42.987 17.4,46.2 v1(21.5,46.2) 27.289,46.2 TP304_B.1 R310_B.1
  Bottom Layer w0.5: J300_B.3 19.3,46.2 v1(21.5,46.2)
OUT_BIAS_A: J300_A.5 R312_A.2 R313_A.2 | length 30.4
  Top Layer w0.5: R313_A.2 60.051,36.727 60.101,36.777 v1(60.101,37.95) ; v1(79.15,37.95) 79.15,35 R312_A.2
  Bottom Layer w0.5: v1(60.101,37.95) 64,37.95 ; J300_A.5 65.797,43.157 64.657,43.157 64,42.5 64,37.95 ; v1(79.15,37.95) 79.1,37.9 79.05,37.95 64,37.95
OUT_BIAS_B: J300_B.5 R312_B.2 R313_B.2 | length 35.5
  Top Layer w0.5: R313_B.2 v1(11.988,37.572) ; v1(31.2,37.2) 32.75,35.65 R312_B.2
  Bottom Layer w0.5: v1(11.988,37.572) 17,37.572 ; J300_B.5 18.797,43.157 17.657,43.157 17,42.5 17,37.572 ; v1(31.2,37.2) 30.828,37.572 17,37.572
pads on no net: FD100. FD101. FD102. FD103. FD104. FD105. U300_A.10 U300_A.11 U300_A.18 U300_B.10 U300_B.11 U300_B.18

## Polygon pours and split planes (outlines as drawn)
AGND on Top Layer "Top Layer-AGND" (solid, remove dead copper, pour order 14): 0,0 0,50 91,50 91,0
no net on Top Layer "Top Layer-No Net" (solid, pour order 8): 74.46,233.6
no net on Top Layer "Top Layer-No Net 1" (solid, pour order 6): 74.6,233.738
AGND on Bottom Layer "Bottom Layer-AGND" (solid, remove dead copper, pour order 16): 0,0 0,50 91,50 91,0
A+3.3V on VCC (split plane): 45.252,19.129 30.464,19.129 27.438,22.155 27.386,22.195 27.325,22.22 27.26,22.229 23.26,22.229 23.195,22.22 23.134,22.195 23.082,22.155 21.656,20.729 15.26,20.729 15.195,20.72 15.134,20.695 15.104,20.673 15.082,20.655 13.882,19.455 0.51,19.455 0.51,30.748 18.128,30.748 18.142,30.721 18.205,30.645 18.281,30.582 18.368,30.536 18.462,30.507 18.56,30.498 27,30.498 27.098,30.507 27.192,30.536 27.279,30.582 27.355,30.645 27.418,30.721 27.464,30.808 27.493,30.902 27.502,31 27.493,31.098 27.484,31.127 37.104,40.748 45.252,40.748
A+5V on VCC (split plane): 45.252,41.252 37,41.252 36.935,41.244 36.874,41.218 36.822,41.178 27.127,31.484 27.098,31.493 27,31.502 18.56,31.502 18.462,31.493 18.368,31.464 18.281,31.418 18.205,31.355 18.142,31.279 18.128,31.252 0.51,31.252 0.51,49.49 45.252,49.49
D+3.3V on VCC (split plane): 74.878,20.572 74.878,7.734 67.654,0.51 0.51,0.51 0.51,18.951 13.986,18.951 14.051,18.959 14.112,18.985 14.164,19.025 15.364,20.225 21.76,20.225 21.825,20.233 21.886,20.258 21.938,20.299 23.364,21.725 27.156,21.725 30.182,18.699 30.234,18.658 30.295,18.633 30.36,18.625 49.716,18.625 49.781,18.633 49.842,18.658 49.894,18.699 50.691,19.496 61.601,19.496 61.667,19.505 61.727,19.53 61.78,19.57 62.316,20.106 70.312,20.106 70.377,20.115 70.438,20.14 70.49,20.18 72.134,21.825 73.626,21.825
A+5V on VCC (split plane): 90.49,31.229 72.9,31.229 72.885,31.256 72.823,31.332 72.747,31.395 72.66,31.441 72.565,31.47 72.467,31.479 64.027,31.479 63.929,31.47 63.9,31.461 54.183,41.178 54.13,41.218 54.07,41.244 54.004,41.252 45.756,41.252 45.756,49.49 90.49,49.49
A+3.3V on VCC (split plane): 63.544,31.104 63.535,31.075 63.525,30.977 63.535,30.879 63.563,30.785 63.61,30.698 63.672,30.622 63.748,30.559 63.835,30.513 63.929,30.484 64.027,30.474 72.467,30.474 72.565,30.484 72.66,30.513 72.747,30.559 72.823,30.622 72.885,30.698 72.9,30.725 90.49,30.725 90.49,0.51 68.367,0.51 75.308,7.452 75.348,7.504 75.374,7.565 75.382,7.63 75.382,20.677 75.374,20.742 75.348,20.803 75.308,20.855 73.908,22.255 73.856,22.295 73.795,22.32 73.73,22.329 72.03,22.329 71.965,22.32 71.904,22.295 71.874,22.273 71.852,22.255 70.207,20.611 62.212,20.611 62.146,20.602 62.086,20.577 62.056,20.554 62.033,20.537 61.497,20 50.587,20 50.522,19.992 50.461,19.967 50.409,19.927 49.611,19.129 45.756,19.129 45.756,40.748 53.9,40.748
AGND on GND (split plane): 90.49,0.51 68.367,0.51 75.308,7.452 75.348,7.504 75.374,7.565 75.382,7.63 75.382,20.677 75.374,20.742 75.348,20.803 75.308,20.855 73.908,22.255 73.856,22.295 73.795,22.32 73.73,22.329 72.03,22.329 71.965,22.32 71.904,22.295 71.852,22.255 70.152,20.555 70.112,20.503 70.086,20.442 70.078,20.377 70.086,20.312 70.112,20.251 70.152,20.199 70.204,20.158 70.265,20.133 70.33,20.125 70.395,20.133 70.456,20.158 70.508,20.199 72.134,21.825 73.626,21.825 74.878,20.572 74.878,7.734 67.654,0.51 0.51,0.51 0.51,18.99 14.025,18.99 14.091,18.999 14.151,19.024 14.204,19.064 15.364,20.225 19.86,20.225 19.925,20.233 19.986,20.258 20.038,20.299 20.078,20.351 20.104,20.412 20.112,20.477 20.104,20.542 20.078,20.603 20.038,20.655 19.986,20.695 19.925,20.72 19.86,20.729 15.26,20.729 15.195,20.72 15.134,20.695 15.082,20.655 13.921,19.494 0.51,19.494 0.51,49.49 45.248,49.49 45.248,19.129 30.464,19.129 27.438,22.155 27.386,22.195 27.325,22.22 27.26,22.229 23.26,22.229 23.195,22.22 23.134,22.195 23.082,22.155 21.614,20.688 21.574,20.636 21.549,20.575 21.54,20.509 21.549,20.444 21.574,20.383 21.614,20.331 21.667,20.291 21.727,20.266 21.793,20.257 21.858,20.266 21.919,20.291 21.971,20.331 23.364,21.725 27.156,21.725 30.182,18.699 30.234,18.658 30.295,18.633 30.36,18.625 49.716,18.625 49.781,18.633 49.842,18.658 49.894,18.699 50.691,19.496 61.601,19.496 61.667,19.505 61.727,19.53 61.78,19.57 62.334,20.125 68.082,20.125 68.147,20.133 68.208,20.158 68.26,20.199 68.301,20.251 68.326,20.312 68.334,20.377 68.326,20.442 68.301,20.503 68.26,20.555 68.208,20.595 68.147,20.62 68.082,20.629 62.23,20.629 62.165,20.62 62.104,20.595 62.074,20.573 62.052,20.555 61.497,20 50.587,20 50.522,19.992 50.461,19.967 50.431,19.944 50.409,19.927 49.611,19.129 45.752,19.129 45.752,49.49 90.49,49.49

## Keep-outs
Bottom Layer:
  lines w0.3: 0,19.177 14,19.177 15.3,20.477 21.76,20.477 23.26,21.977 27.26,21.977 30.278,18.959 30.278,18.877 ; 30.278,18.918 49.757,18.918 50.587,19.748 61.601,19.748 62.23,20.377 70.257,20.377 71.957,22.077 73.754,22.077 75.13,20.701 75.13,7.63 67.5,0
Keep-Out Layer:
  circle w0.1: c87.5,46.592 r3
  circle w0.1: c3.5,3.5 r3
  lines w0.3: 0,19.177 14.173,19.177 15.473,20.477 16.16,20.477 ; 30.4,18.877 49.716,18.877 50.587,19.748 61.601,19.748 62.23,20.377 63.13,20.377
  lines w0.5: 67.5,0 75.13,7.63 75.13,19.377 ; 0,0 91,0 91,50 0,50 0,0

## Other copper
Top Layer:
  rectangle net 5V_REF_B: 36.1,28.427 37.8,33.7
  pour cut-out: 16.279,27.395 26.779,27.395 26.779,16.895 16.279,16.895
  pour cut-out: 63.33,27.377 73.83,27.377 73.83,16.877 63.33,16.877
Bottom Layer:
  region net AGND: 76,49.5 70.5,49.5 70.5,47.58 76,47.58
  rectangle net AGND: 62,47.58 67.5,49.5
  rectangle net AGND: 67.8,42.5 73.3,44.5
  rectangle net AGND: 38.5,39.96 44,41.96
  region net AGND: 52.5,41.96 47,41.96 47,39.96 52.5,39.96
  rectangle net AGND: 20.8,42.5 26.3,44.5
  rectangle net AGND: 15,47.58 20.5,49.5
  region net AGND: 29,49.5 23.5,49.5 23.5,47.58 29,47.58
  region net AGND: 52.5,47.12 47,47.12 47,45.12 52.5,45.12
  rectangle net AGND: 38.5,45.04 44,47.04
  region net A+5V: 52.5,44.5 47,44.5 47,42.5 52.5,42.5
  rectangle net A+5V: 38.5,42.5 44,44.5
  region net A+3.3V: 49.7,39.2 46.5,39.2 46.5,35.5 49.7,35.5
  rectangle net A+3.3V: 41.3,35.5 44.5,39.2
  region net D+3.3V: 42.8,11.2 44.9,11.2 44.9,7.4 47.3,5 47.3,0.6 42.8,0.6
  region net AGND: 49.9,2.8 48,2.8 48,5.1 45.4,7.7 45.4,13.2 49.9,13.2
VCC (plane layer: these items are gaps in the copper):
  lines w0.5: 0,19.203 13.986,19.203 15.26,20.477 21.76,20.477 23.26,21.977 27.26,21.977 30.36,18.877 49.716,18.877 50.587,19.748 61.601,19.748 62.212,20.358 70.312,20.358 72.03,22.077 73.73,22.077 75.13,20.677 75.13,7.63 67.5,0 ; 0,31 27,31 37,41 45.5,41 ; 45.504,18.877 45.504,49.5 ; 45.504,41 54.004,41 64.027,30.977 91,30.977
  lines w1: 18.56,31 27,31 ; 64.027,30.977 72.467,30.977
GND (plane layer: these items are gaps in the copper):
  lines w0.5: 0,19.242 14.025,19.242 15.26,20.477 19.86,20.477 ; 21.793,20.509 23.26,21.977 27.26,21.977 30.36,18.877 49.716,18.877 50.587,19.748 61.601,19.748 62.23,20.377 68.082,20.377 ; 45.5,18.877 45.5,49.5 ; 67.5,0 75.13,7.63 75.13,20.677 73.73,22.077 72.03,22.077 70.33,20.377

## Silkscreen, mask and mechanical layers (free items; w line width, h text height)
Top Overlay:
  lines w0.16: 2.642,25.677 5.36,25.677 6.06,24.977 ; 10.552,37.327 10.552,34.183 11.151,33.585 ; 12.837,46.327 13.91,45.254 13.91,43.264 15,42.174 ; 25.21,47.579 26.333,47.579 29.7,44.212 29.7,41.877 ; 49.571,39.341 60.373,39.341 ; 72.7,16 75,16
  text ".ProjectName Rev. .Revision" at 42.169,1 h4
Bottom Solder:
  text "B" at 80.5,8.13 h10 r270
Mechanical 1:
  the board outline again, w0.1